# Altium PCB LoRasPi_02.PcbDoc
Units mm, origin at the board's own origin, x right, y up, seen from the top; angles counter-clockwise.
Board outline 65.85 x 56.13 mm, 4 copper layers (Top Layer, Layer 1, Layer 2, Bottom Layer), stack 1.606 mm thick; 22 components, 19 nets, 154 pads, 156 vias.
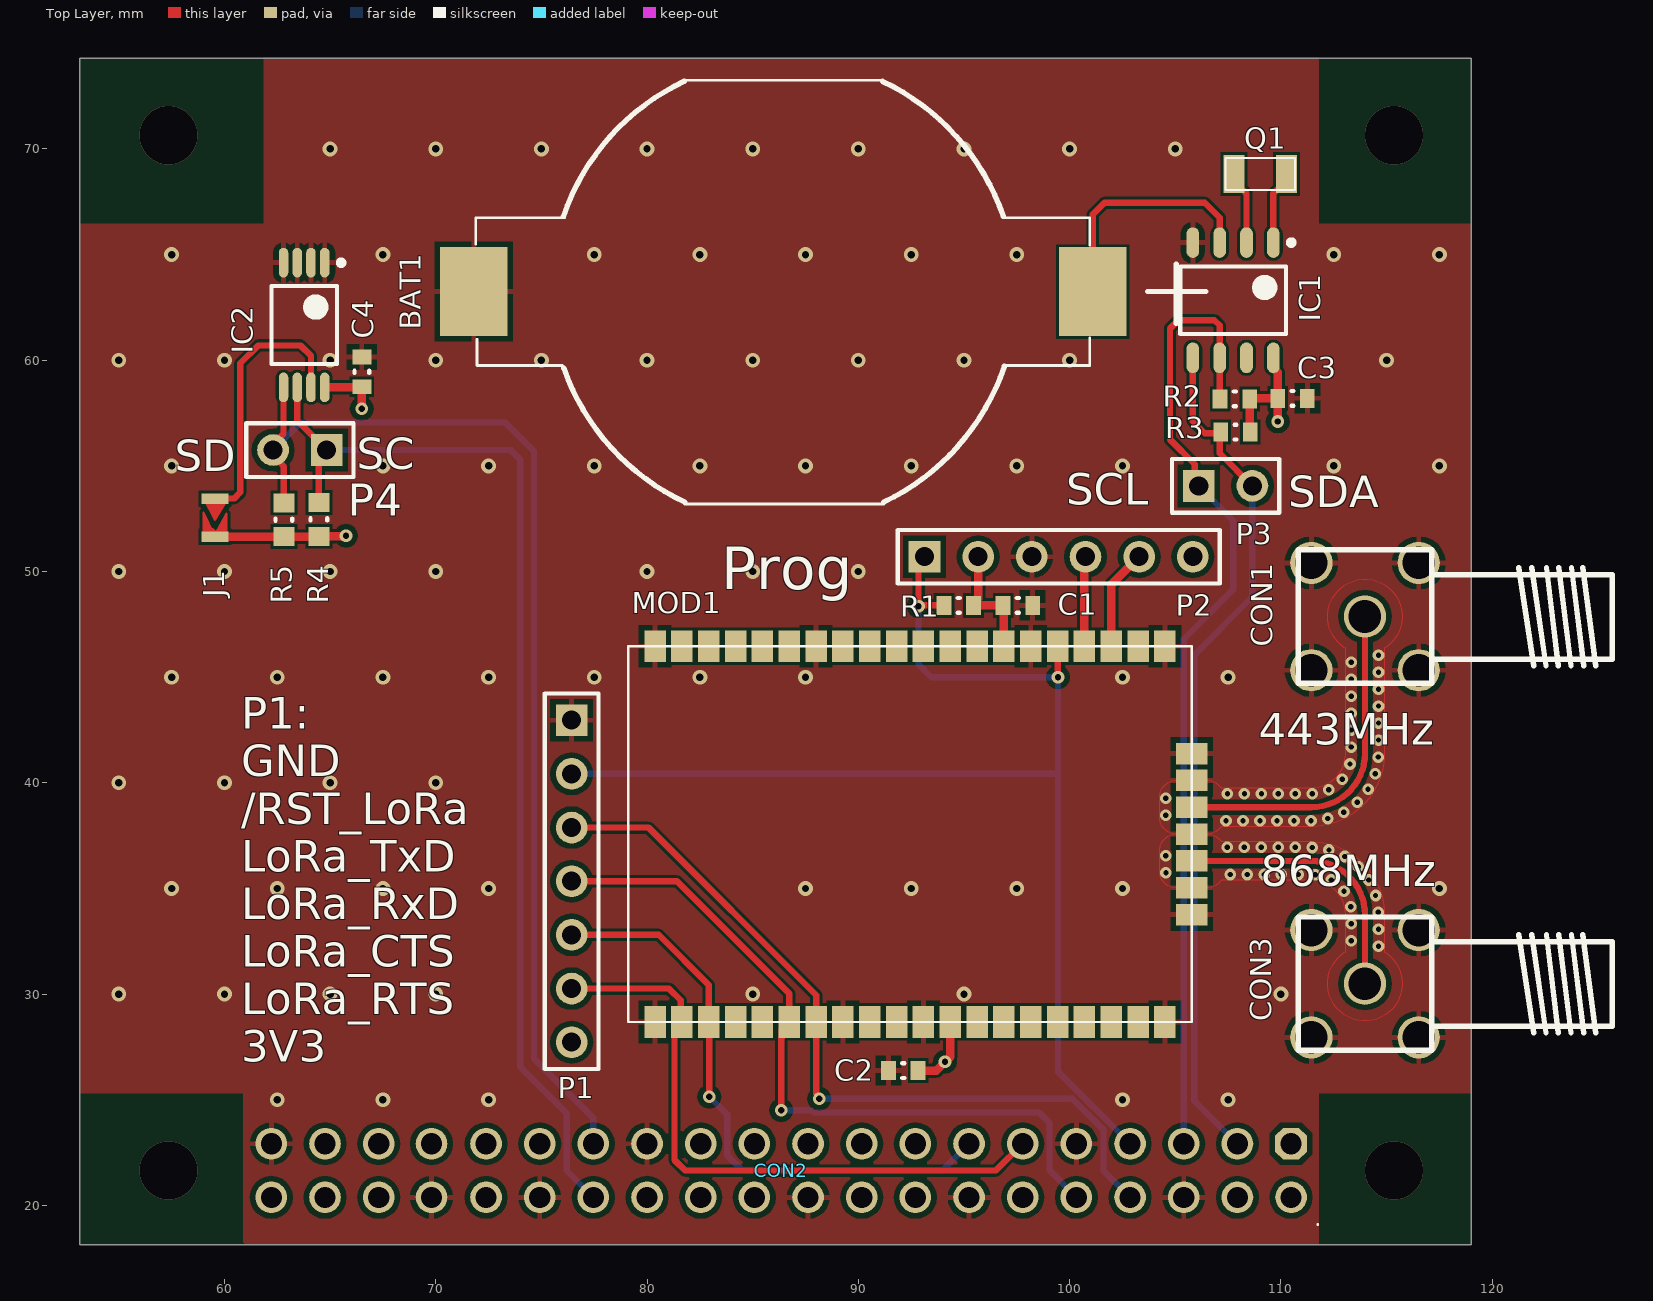
[diagram p0: Top Layer view]
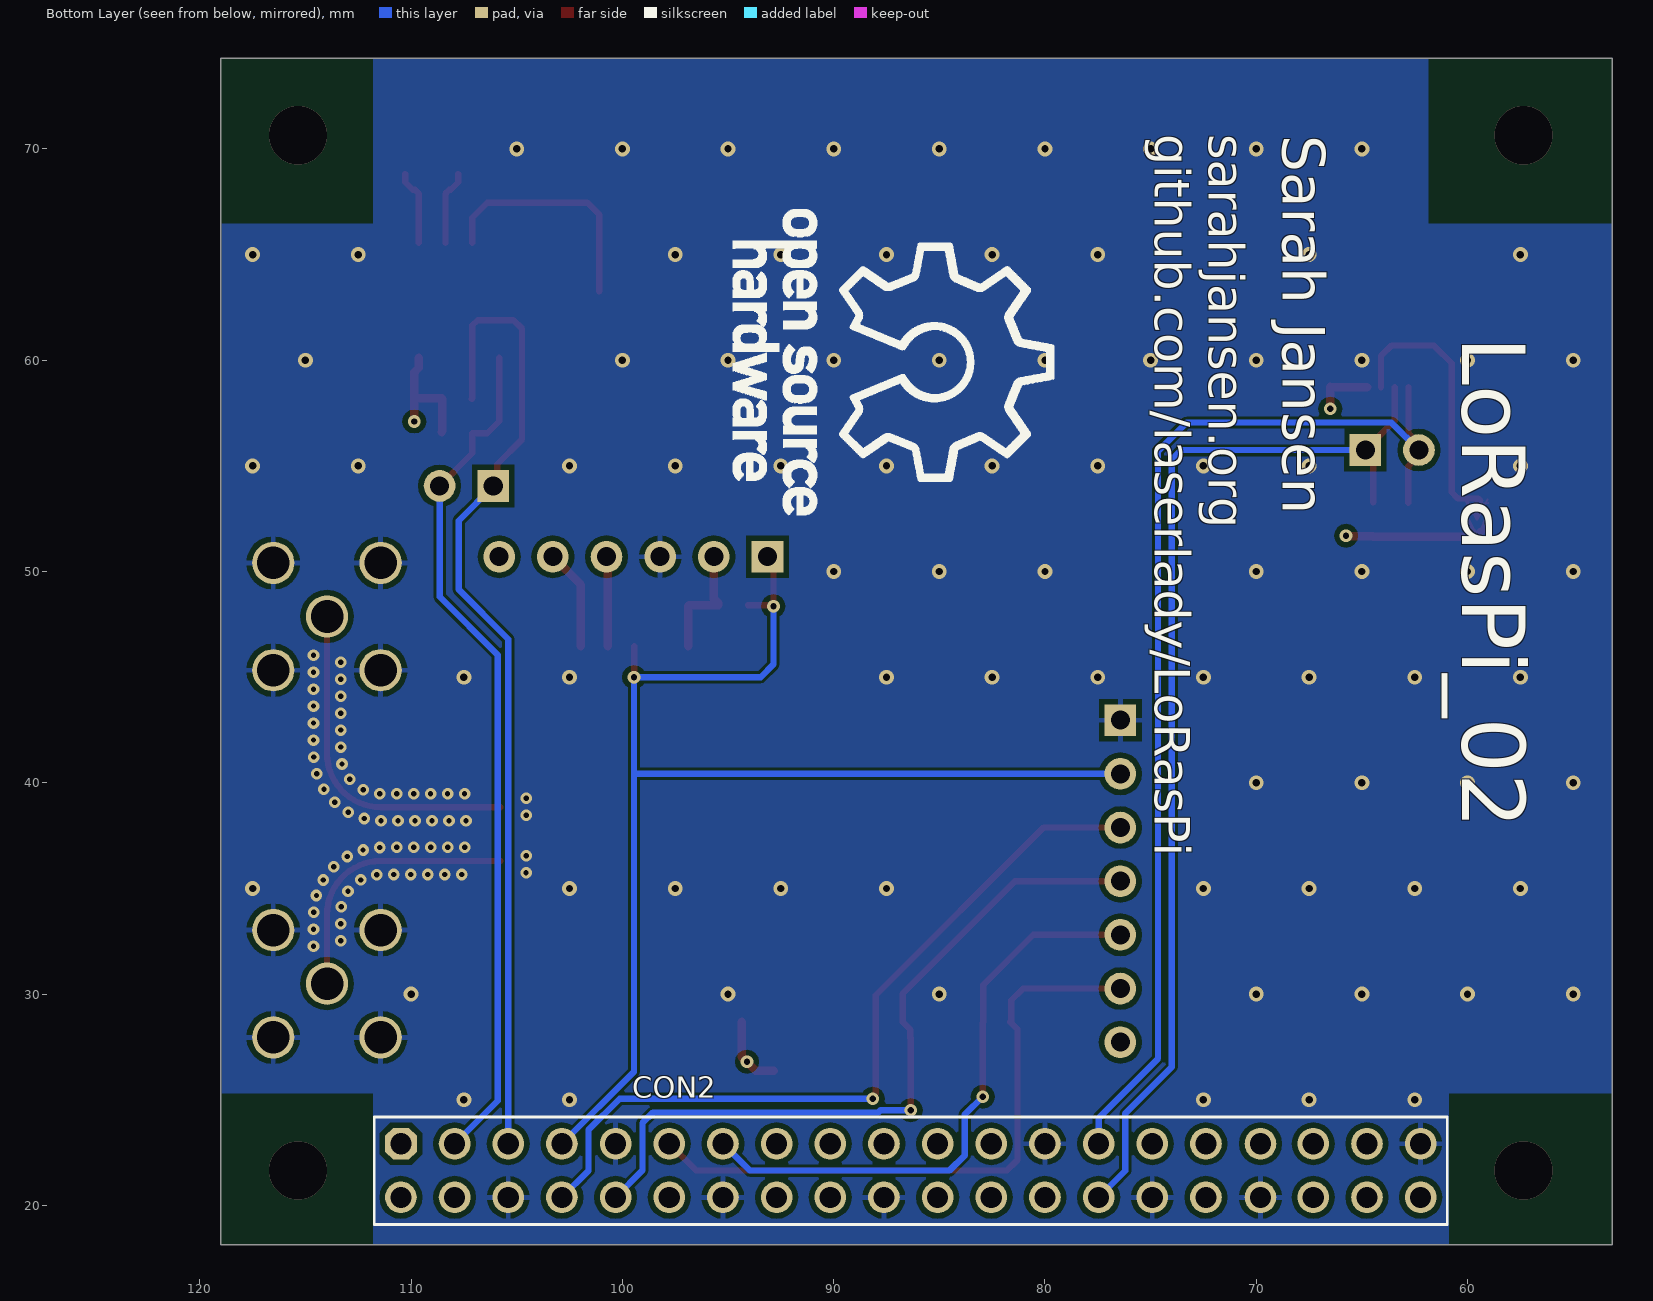
[diagram p1: Bottom Layer view, seen from below]
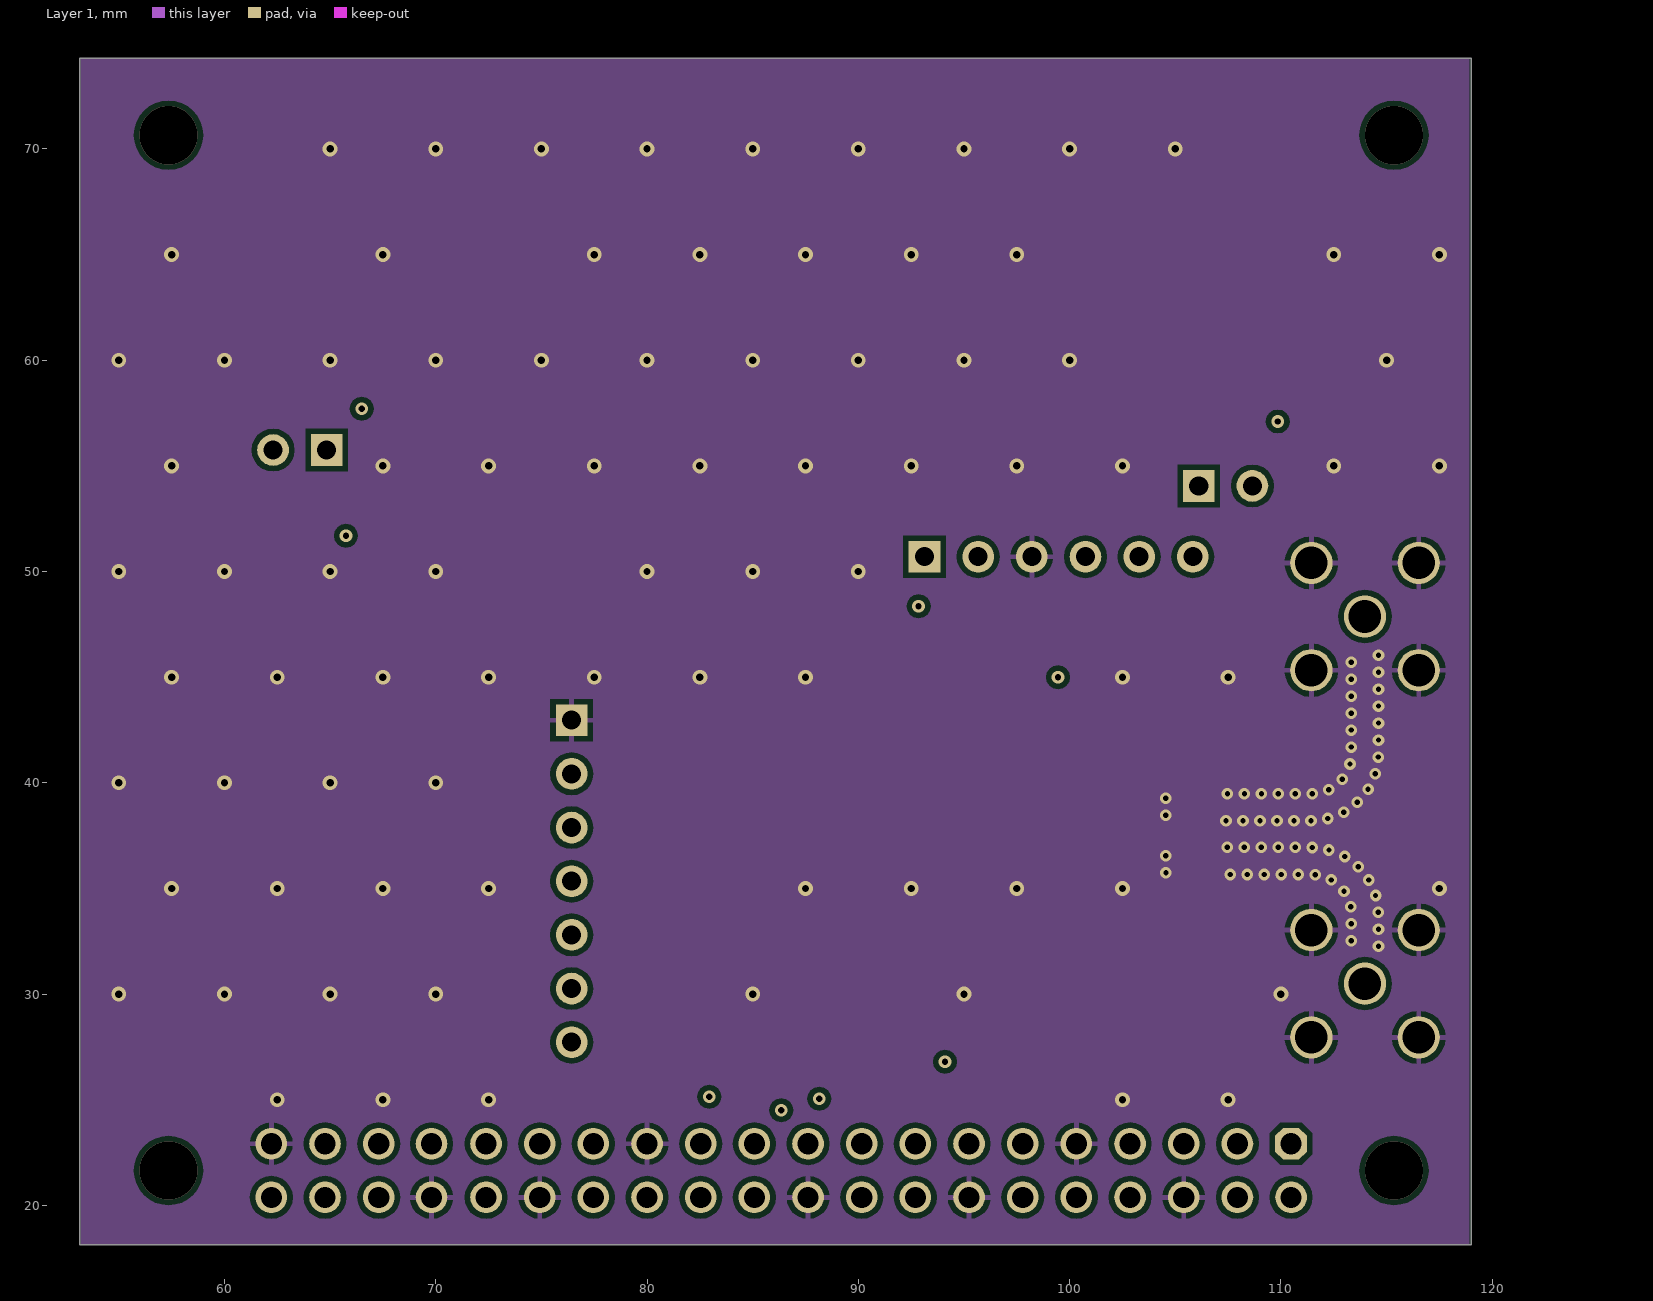
[diagram p2: Layer 1]
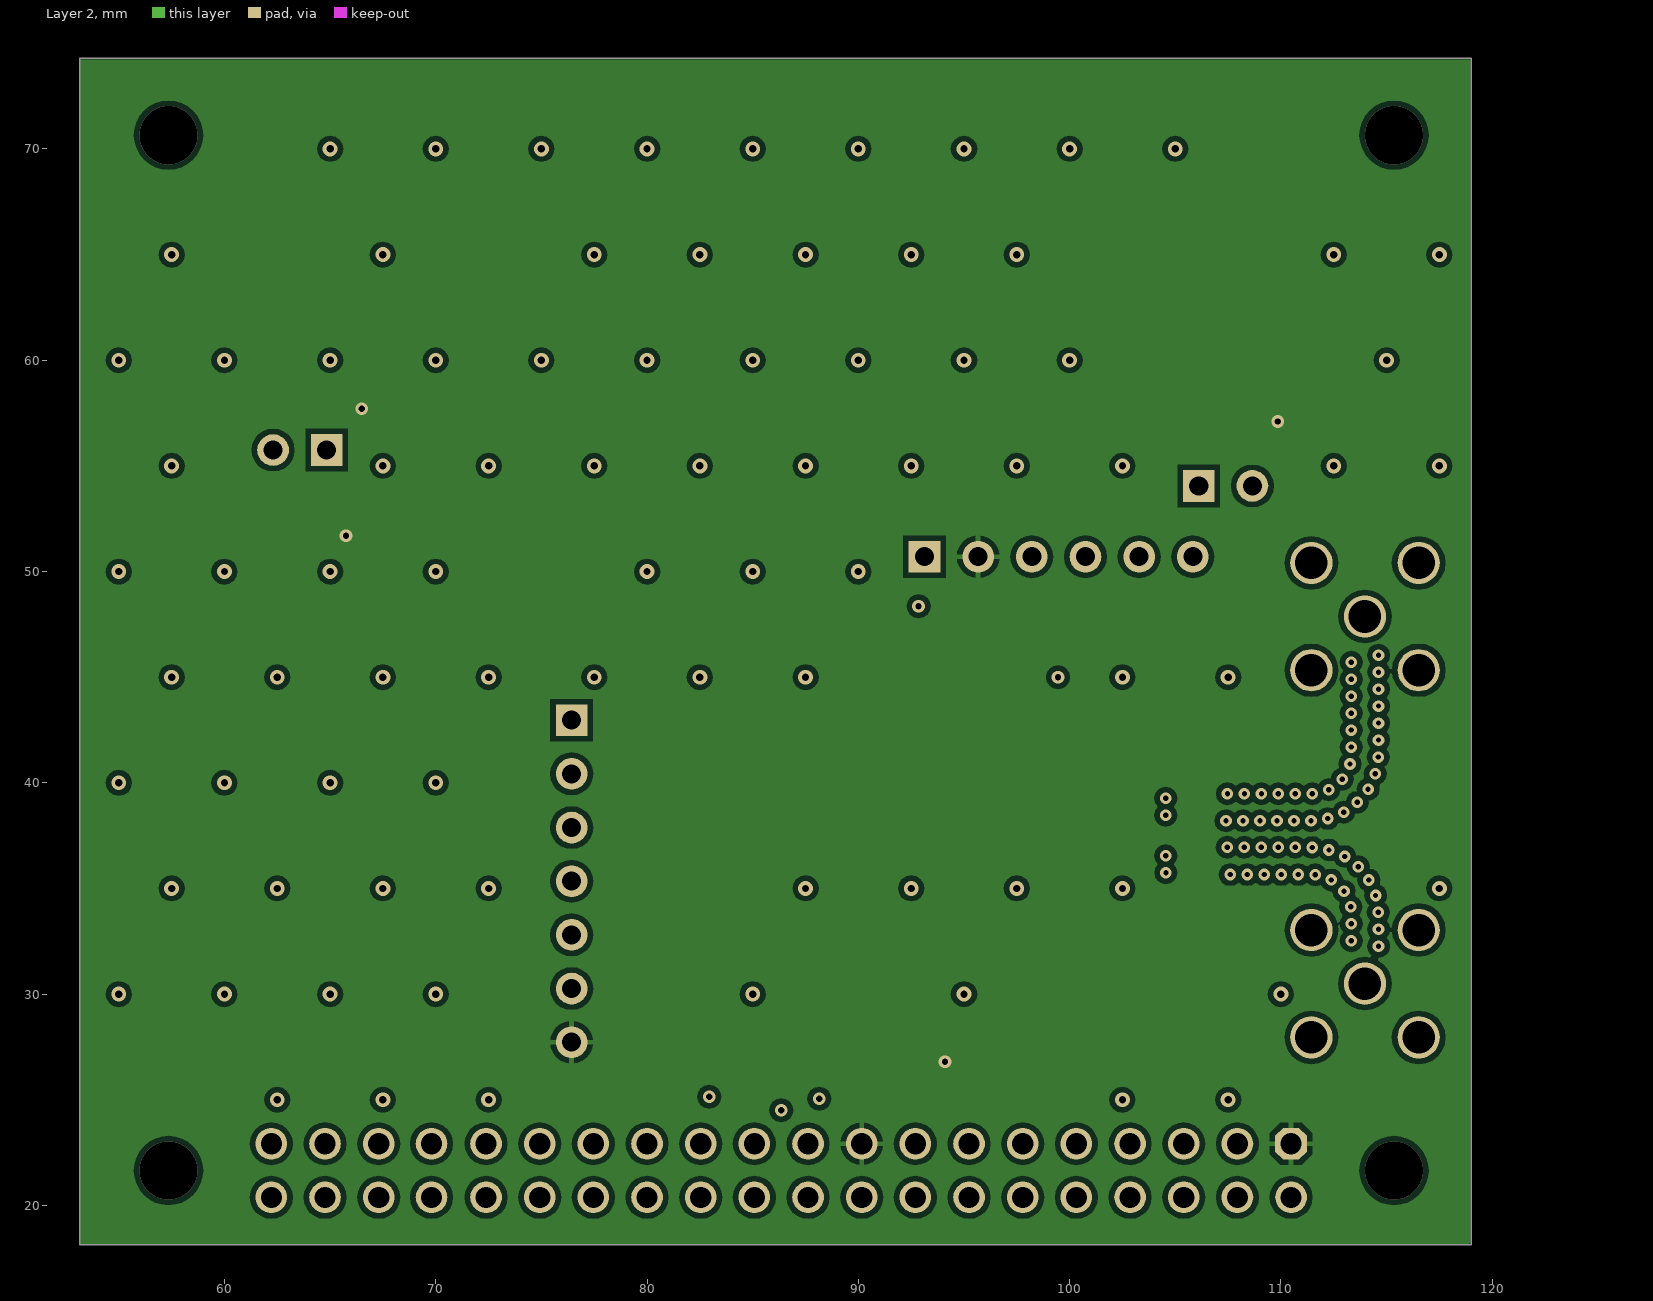
[diagram p3: Layer 2]
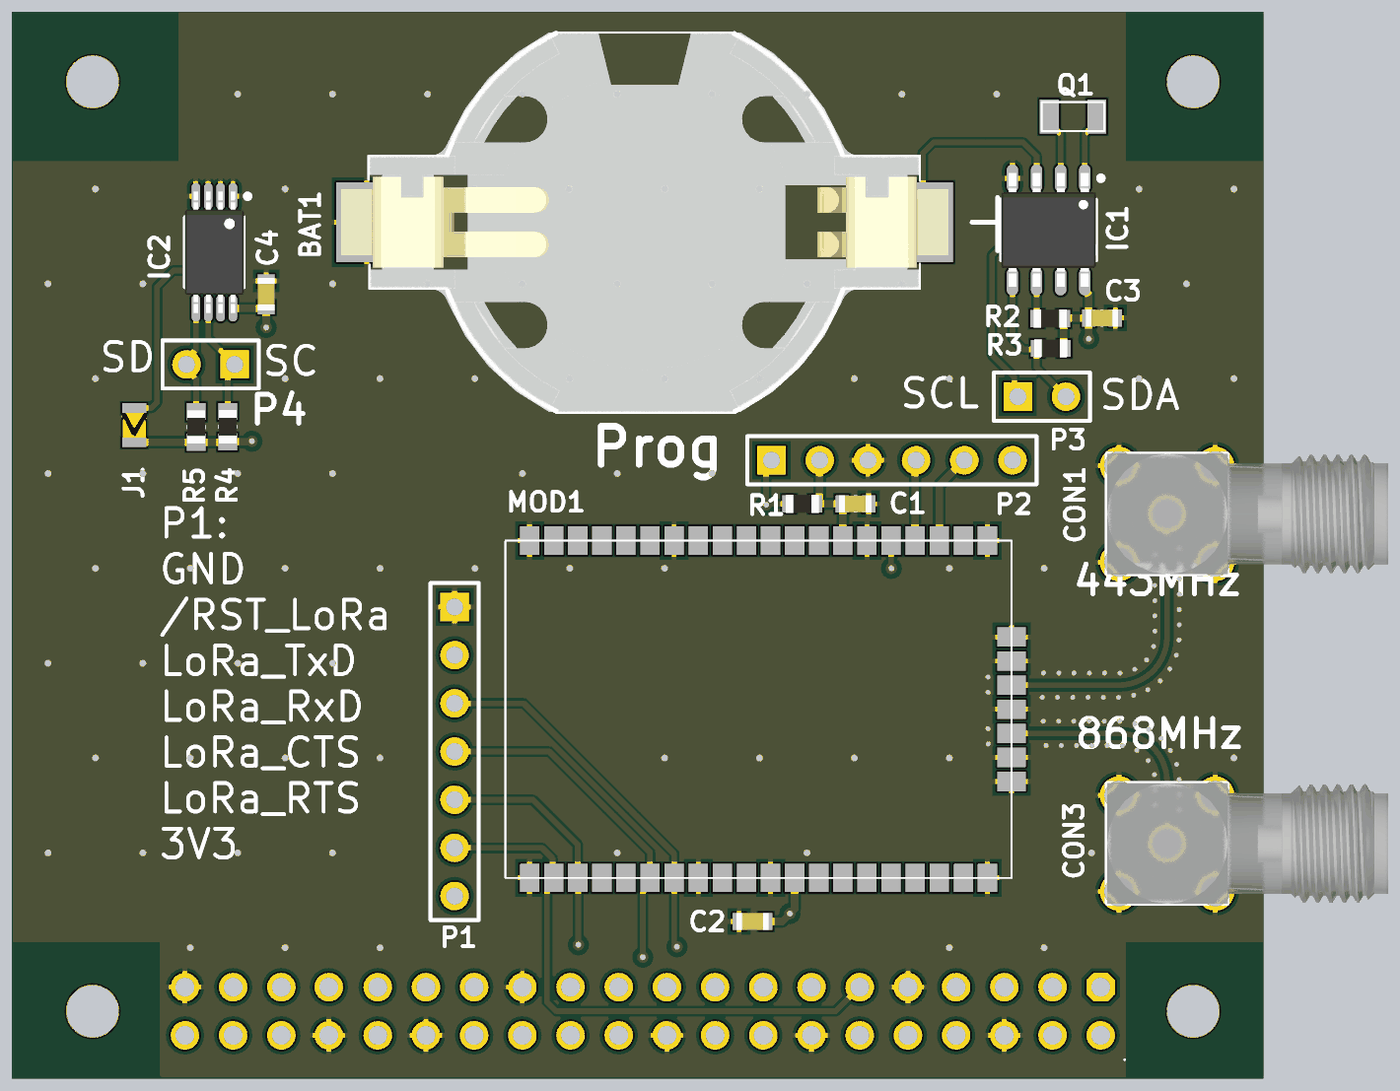
[diagram p4: 3D render of the assembled board from above, using the file's embedded part models]

## Layer stack, top to bottom
Top Solder: solder mask 0.0102, Solder Resist, Dk 3.5
Top Layer: signal copper 0.0356
Dielectric 2: prepreg 0.2, PP-006, Dk 4.1
Layer 1: signal copper 0.035
Dielectric 1: dielectric 1.065, FR-4, Dk 4.8
Layer 2: signal copper 0.035
Dielectric 3: prepreg 0.2, PP-006, Dk 4.1
Bottom Layer: signal copper 0.0356
Bottom Solder: solder mask 0.0102, Solder Resist, Dk 3.5

## Board outline
53.15,18.15 119.001,18.15 119.001,74.284 53.15,74.284

## Design rules (kind name [scope] priority, off if disabled: settings)
Clearance [All] p1: gap=0.254 ignorepadtopadclearanceinfootprint=FALSE except(0: THPad-Hole Via-Hole Fill-Hole Poly-Hole Region-Hole Text-Hole; 0.127: Arc-Arc Arc-Track Arc-Fill Arc-Poly Arc-Region Track-Track Track-Fill Track-Poly Track-Region SMDPad-SMDPad SMDPad-Via SMDPad-Fill SMDPad-Poly SMDPad-Region; 0.2: Arc-SMDPad Arc-Via Track-SMDPad Track-Via; 0.33: Arc-THPad Track-THPad SMDPad-THPad THPad-Via; 0.5: THPad-THPad)
HoleSize [All] p1: absolutevalues=TRUE maxlimit=6.3 minlimit=0.3 maxpercent=80.000 minpercent=20.000
MinimumAnnularRing [All] p1: minimumring=0.15
PlaneClearance PlaneClearance_1 [InNetClass('HF')] p1: clearance=0.2
PlaneClearance [All] p2: clearance=0.508
PolygonConnect [All] p1: thpad.connectstyle=Relief thpad.reliefconductorwidth=0.254 thpad.reliefentries=4 thpad.polygonreliefangle="90 Angle" thpad.airgapwidth=0.254 smdpad.connectstyle=Relief smdpad.reliefconductorwidth=0.254 smdpad.reliefentries=4 smdpad.polygonreliefangle="90 Angle" smdpad.airgapwidth=0.254 via.connectstyle=Direct via.reliefconductorwidth=0.254 via.reliefentries=4 via.polygonreliefangle="90 Angle" via.airgapwidth=0.254
RoutingVias [All] p1: holewidth=0.3 width=0.6 viastyle="Through Hole" minholewidth=0.2 minwidth=0.5 maxholewidth=1 maxwidth=2
SolderMaskExpansion [All] p1: expansion=0.102 istentingtop=FALSE
Width "Schematic Width Constraint" [InNetClass('HF')] p1: maxlimit=0.293 minlimit=0.254 preferedwidth=0.254 toplayer_minwidth=0.293 toplayer_prefwidth=0.293 midlayer1_maxwidth=0.254 midlayer2_maxwidth=0.254 bottomlayer_maxwidth=0.254 minimp=50.000000 maximp=50.000000 favimp=50.000000
Width [All] p2: maxlimit=2 minlimit=0.2 preferedwidth=0.254 minimp=50.000000 maximp=50.000000 favimp=50.000000
28 further rules are at their usual default settings.

## Classes and differential pairs
net class HF: HF-Out-433 HF-Out-868

## Components (designator, comment, footprint, x,y, rotation, side; value= is the part's Value field where it differs from the comment)
BAT1 "BU2032SM-HD-G" BU2032SM-HD-G 86.45,63.25 r0 top
C1 "1u 25v" C-0603-H 97.55,48.4 r180 top
C2 "1u 25v" C-0603-H 92.13,26.383 r0 top
C3 "100n 25V" C-0603-H 110.55,58.2 r180 top
C4 "100n 25V" C-0603-H 66.5,59.45 r270 top
CON1 "733910080" 733910080 113.98,47.869 r270 top
CON2 "RasPi Expansion" "RasPi Expansion" 86.35,21.65 r90 top
CON3 "733910080" 733910080 113.98,30.493 r270 top
IC1 "DS1307" SOIC8 107.735,62.842 r270 top
IC2 "24C64" TSSOP8 63.77,61.667 r270 top
J1 "Lötbrücke_kl" Solderbridge_kl 59.55,52.55 r180 top
MOD1 "RN2483" RN2483 79.11,46.463 r270 top
P1 "Header 7" HDR1X7 76.43,42.963 r270 top
P2 "Header 6" HDR1X6 93.13,50.7 r0 top
P3 "Header 2" HDR1X2 106.11,54.05 r0 top
P4 "Header 2" HDR1X2 64.84,55.75 r180 top
Q1 "FC-135R 32.7680KA-A3" FC-135 109.02,68.817 r0 top
R1 "10k" R-0603-H 94.75,48.4 r0 top
R2 "10k" R-0603-H 107.82,58.167 r0 top
R3 "10k" R-0603-H 107.85,56.6 r0 top
R4 "3K9" R-0603-M 64.47,52.467 r270 top
R5 "3K9" R-0603-M 62.811,52.454 r270 top

## Footprints (in the part's own frame and the unit in brackets; to place one, negate y for a bottom-side part, rotate by r counter-clockwise, add the part's x,y. Pads: shape width x height; smd on the part's side, far side on the other; paste and mask are expansions set on the pad)
733910080 [mm]
  round 2 hole 1.54: 1(-0.003,-0.004) 2(-2.54,2.54) 3(2.54,2.54) 4(2.54,-2.54) 5(-2.54,-2.54)
  silkscreen extent -3.16,-3.15 3.15,11.7, body extent -3.18,-3.15 3.17,11.65, height 10.07
BU2032SM-HD-G [mm]
  rect 3.2x4.2 smd: 1(14.65,0) 2(-14.65,0)
  silkscreen extent -14.55,-10.05 20,10, body extent -16,-10 16,10, height 5.3
C-0603-H [mm] "Chip Resistor, Body 1.6x0.8mm, IPC High Density"
  rect 0.7x0.9 smd: 1(-0.7,0) 2(0.7,0)
  silkscreen extent -0.05,-0.35 0.05,0.35, body extent -0.85,-0.45 0.85,0.45, height 0.9
FC-135 [mm]
  rect 1x1.8 smd: 1(-1.25,0) 2(1.25,0)
  silkscreen extent -1.65,-0.76 1.65,0.76, body extent -1.65,-0.76 1.65,0.76, height 0.8
HDR1X2 [mm] "Connector; Header; 2 Position"
  rect 1.5x1.5 hole 0.9: 1(0,0)
  round 1.5 hole 0.9: 2(2.54,0)
  silkscreen extent -1.27,-1.27 3.81,1.27
HDR1X6 [mm] "Connector; Header; 6 Position"
  rect 1.5x1.5 hole 0.9: 1(0,0)
  round 1.5 hole 0.9: 2(2.54,0) 3(5.08,0) 4(7.62,0) 5(10.16,0) 6(12.7,0)
  silkscreen extent -1.27,-1.27 13.97,1.27
HDR1X7 [mm] "Connector; Header; 7 Position"
  rect 1.5x1.5 hole 0.9: 1(0,0)
  round 1.5 hole 0.9: 2(2.54,0) 3(5.08,0) 4(7.62,0) 5(10.16,0) 6(12.7,0) 7(15.24,0)
  silkscreen extent -1.27,-1.27 16.51,1.27
R-0603-H [mm] "Chip Resistor, Body 1.6x0.8mm, IPC High Density"
  rect 0.7x0.9 smd: 1(-0.7,0) 2(0.7,0)
  silkscreen extent -0.05,-0.35 0.05,0.35, body extent -0.87,-0.47 0.88,0.48, height 0.55
R-0603-M [mm] "Chip Resistor, Body 1.6x0.8mm, IPC Medium Density"
  rect 0.9x1 smd: 1(-0.8,0) 2(0.8,0)
  silkscreen extent -0.05,-0.4 0.05,0.4, body extent -0.87,-0.47 0.88,0.48, height 0.55
"RasPi Expansion" [mm]
  oct 1.5x1.5 hole 1: 1(1.27,-24.13)
  round 1.5 hole 1: 2(-1.27,-24.13) 3(1.27,-21.59) 4(-1.27,-21.59) 5(1.27,-19.05) 6(-1.27,-19.05) 7(1.27,-16.51) 8(-1.27,-16.51) 9(1.27,-13.97) 10(-1.27,-13.97) 11(1.27,-11.43) 12(-1.27,-11.43) 13(1.27,-8.89) 14(-1.27,-8.89) 15(1.27,-6.35) 16(-1.27,-6.35) 17(1.27,-3.81) 18(-1.27,-3.81) 19(1.27,-1.27) 20(-1.27,-1.27) 21(1.27,1.27) 22(-1.27,1.27) 23(1.27,3.81) 24(-1.27,3.81) 25(1.27,6.35) 26(-1.27,6.35) 27(1.27,8.89) 28(-1.27,8.89) 29(1.27,11.43) 30(-1.27,11.43) 31(1.27,13.97) 32(-1.27,13.97) 33(1.27,16.55) 34(-1.27,16.55) 35(1.27,19.05) 36(-1.27,19.05) 37(1.27,21.59) 38(-1.27,21.59) 39(1.27,24.13) 40(-1.27,24.13)
  silkscreen extent -2.56,-25.39 -2.55,-25.39
RN2483 [mm]
  rect 1.5x1.02 smd: 1(17.78,1.27) 2(17.78,2.54) 3(17.78,3.81) 4(17.78,5.08) 5(17.78,6.35) 6(17.78,7.62) 7(17.78,8.89) 8(17.78,10.16) 9(17.78,11.43) 10(17.78,12.7) 11(17.78,13.97) 12(17.78,15.24) 13(17.78,16.51) 14(17.78,17.78) 15(17.78,19.05) 16(17.78,20.32) 17(17.78,21.59) 18(17.78,22.86) 19(17.78,24.13) 20(17.78,25.4) 28(0,25.4) 29(0,24.13) 30(0,22.86) 31(0,21.59) 32(0,20.32) 33(0,19.05) 34(0,17.78) 35(0,16.51) 36(0,15.24) 37(0,13.97) 38(0,12.7) 39(0,11.43) 40(0,10.16) 41(0,8.89) 42(0,7.62) 43(0,6.35) 44(0,5.08) 45(0,3.81) 46(0,2.54) 47(0,1.27)
  rect 1.02x1.5 smd: 21(12.7,26.67) 22(11.43,26.67) 23(10.16,26.67) 24(8.89,26.67) 25(7.62,26.67) 26(6.35,26.67) 27(5.08,26.67)
  silkscreen extent 0,0 17.78,26.67, body extent 0,0 17.78,26.67, height 3.34
SOIC8 [mm] "SOIC, 8-Leads, Body 4,90x3,90mm, Pitch 1,27mm, IPC Medium Density"
  oval 1.45x0.6 smd: 1(-2.725,1.905) 2(-2.725,0.635) 3(-2.725,-0.635) 4(-2.725,-1.905) 5(2.725,-1.905) 6(2.725,-0.635) 7(2.725,0.635) 8(2.725,1.905)
  silkscreen extent -2.85,-2.5 1.6,2.88, body extent -3,-2.5 3,2.5, height 1.75
Solderbridge_kl [mm]
  rect 1.27x0.5 smd mask+0.102: 1(0,0.9)
  rect 1.27x0.5 smd: 2(0,-0.9)
  Top Layer lines w0.1: 0.55,-0.244 0.55,0.7 0.15,0.7 0.5,-0.15 ; 0.55,-0.25 0.05,0.8 ; 0.55,-0.7 -0.45,-0.65 ; 0.5,-0.05 0.5,0.65 0.25,0.65 0.45,0.1 0.45,0.6 0.35,0.6 0.35,0.375 0.45,0.55 ; 0.5,-0.85 0.002,0.1 ; 0.05,-0.5 0,-0.35 -0.05,-0.5 0.15,-0.5 0,-0.2 -0.15,-0.55 0.25,-0.55 0,-0.05 -0.25,-0.6 0.35,-0.6 ; 0.002,0.095 -0.548,-0.805 ; 0,0.8 -0.55,-0.2 ; -0.35,-0.6 0.35,-0.6 ; -0.4,0.4 -0.45,0.1 -0.45,0.4 -0.3,0.55 -0.45,0.55 -0.45,0.2 -0.2,0.6 -0.5,0.6 -0.5,-0.05 -0.1,0.65 -0.55,0.65 -0.55,-0.194 ; 0.35,-0.6 0,0.1 -0.3,-0.55 -0.3,-0.6 ; -0.3,-0.6 -0.43,-0.73 -0.3,-0.6
TSSOP8 [mm] "TSOP, 8-Leads, Body 3,00x4,40mm, Pitch 0,65mm, IPC Medium Density"
  oval 1.4x0.45 smd: 1(-2.95,0.975) 2(-2.95,0.325) 3(-2.95,-0.325) 4(-2.95,-0.975) 5(2.95,-0.975) 6(2.95,-0.325) 7(2.95,0.325) 8(2.95,0.975)
  silkscreen extent -3.07,-1.55 1.85,1.88, body extent -3.2,-1.55 3.2,1.55, height 1.2

## Part data
BAT1: "Batteriehalter CR2032"
C1 C2: library part C-0603-1u-25V, "Capacitor 1uF 25V", Supplier Part Number 1=80-C0603C105K3R, Supplier 1=Mouser
C3 C4: library part C-0603-100n-25V, "Capacitor 100n 25V", Supplier Part Number 1=80-C0603C104K3R, Supplier 1=Mouser
CON1 CON3: "SMA Connector THT gewinkelt", Supplier Part Number 1=WM4088-ND, ComponentLink1Description="New link", Supplier 1=Digi-Key, Supplier 2=Farnell, Supplier 3=Mouser, Supplier 4=Arrow, Supplier Part Number 2=2579835, Supplier Part Number 3=538-73391-0080, Supplier Part Number 4=73391-0080
CON2: library part "RasPi Expansion_2", "Raspberry Pi, 40P Expansion port"
IC1: "RTC, I2C, 64x8"
IC2: library part "M24C64 DW", "EEPROM 64KBit I2C TSSOP8"
J1: library part Solderbridge_kl, "Lötbrücke klein"
MOD1: "LoRa Modul", Supplier Part Number 1=RN2483A-I/RM105-ND, Supplier 1=Digi-Key, Supplier 2=Farnell, Supplier 3=Mouser, Supplier Part Number 2=2932051, Supplier Part Number 3=579-RN2483A-I/RM105
P1: "Header, 7-Pin", LatestRevisionDate=17-Jul-2002, LatestRevisionNote="Re-released for DXP Platform.", Publisher="Altium Limited"
P2: "Header, 6-Pin", LatestRevisionDate=17-Jul-2002, LatestRevisionNote="Re-released for DXP Platform.", Publisher="Altium Limited"
P3 P4: "Header, 2-Pin", LatestRevisionDate=17-Jul-2002, LatestRevisionNote="Re-released for DXP Platform.", Publisher="Altium Limited"
Q1: library part "Xtal FC-135 32.7680KA-A3", "32,768KHz", Supplier Part Number 1=SE2413CT-ND, Supplier 1=Digi-Key, Supplier 2=Mouser, Supplier Part Number 2=732-FC-13532.768KAAC
R1 R2 R3: library part R-0603-10k, "Resistor 10k", Supplier Part Number 1=71-CRCW0603-10K-E3, Supplier 1=Mouser
R4 R5: library part R-0603-3k9, "Resistor 3k9"

## Via types
v1: diameter 0.7, hole 0.35, Top Layer to Bottom Layer, tented both sides, 81 vias
v2: diameter 0.55, hole 0.25, Top Layer to Bottom Layer, tented both sides, 62 vias
v3: diameter 0.6, hole 0.3, Top Layer to Bottom Layer, tented both sides, 9 vias
v4: diameter 2.75, hole 2.75, Top Layer to Bottom Layer, 4 vias

## Nets (pads, with @x,y where several pads share a name; then routed paths per layer and width w, separated by ;. In a path a pad name is that pad's centre, name@x,y a point inside that pad or via, vN(x,y) a via of type N, cw(c..) or ccw(c..) an arc to the next point about the centre after c; other vN are vias at no path point)
/RST_LoRa: CON2.7 MOD1.32 P1.2 P2.1 R1.1 | length 61.3
  Top Layer w0.3: P2.1 92.85,50.42 v3(92.85,48.35) 92.9,48.4 R1.1 ; MOD1.32 99.43,45.07 99.45,45.05 v3(99.45,45)
  Bottom Layer w0.3: P1.2 99.423,40.423 99.45,40.45 ; v3(92.85,48.35) 92.85,45.6 93.45,45 v3(99.45,45) 99.45,40.45 ; CON2.7 99.45,26.33 99.45,40.45
GND: BAT1.2 C1.1 C2.1 C3.1 C4.1 CON1.2 CON1.3 CON1.4 CON1.5 CON2.6 CON2.9 CON2.14 CON2.20 CON2.25 CON2.30 CON2.34 CON2.39 CON3.2 CON3.3 CON3.4 CON3.5 IC1.4 IC2.1 IC2.2 IC2.3 IC2.4 MOD1.1 MOD1.8 MOD1.11 MOD1.20 MOD1.21 MOD1.22 MOD1.24 MOD1.26 MOD1.27 MOD1.28 MOD1.33 MOD1.41 MOD1.47 P1.1 P2.3
  other v1: 62.5,25 67.5,25 72.5,25 102.5,25 107.5,25 55,30 60,30 65,30 70,30 85,30 95,30 110,30 57.5,35 62.5,35 67.5,35 72.5,35 87.5,35 92.5,35 97.5,35 102.5,35 117.5,35 55,40 60,40 65,40 70,40 57.5,45 62.5,45 67.5,45 72.5,45 77.5,45 82.5,45 87.5,45 102.5,45 107.5,45 55,50 60,50 65,50 70,50 80,50 85,50 90,50 57.5,55 67.5,55 72.5,55 77.5,55 82.5,55 87.5,55 92.5,55 97.5,55 102.5,55 112.5,55 117.5,55 55,60 60,60 65,60 70,60 75,60 80,60 85,60 90,60 95,60 100,60 115,60 57.5,65 67.5,65 77.5,65 82.5,65 87.5,65 92.5,65 97.5,65 112.5,65 117.5,65 65,70 70,70 75,70 80,70 85,70 90,70 95,70 100,70 105,70
  other v2: 114.619,32.265 113.333,32.523 114.619,33.069 113.333,33.327 114.608,33.873 113.305,34.13 114.48,34.666 112.983,34.867 112.386,35.405 114.152,35.4 107.6,35.66 108.404,35.66 109.208,35.66 110.012,35.66 110.816,35.66 111.62,35.65 104.556,35.743 113.658,36.035 113.013,36.515 104.546,36.547 112.271,36.824 111.475,36.941 107.455,36.946 108.259,36.946 109.063,36.946 109.867,36.946 110.671,36.946 107.401,38.2 108.205,38.2 109.009,38.2 109.813,38.2 110.617,38.2 111.421,38.2 112.218,38.31 104.546,38.468 112.967,38.602 113.616,39.075 104.546,39.272 111.487,39.483 107.467,39.486 108.271,39.486 109.075,39.486 109.879,39.486 110.683,39.486 112.267,39.677 114.123,39.699 112.898,40.176 114.465,40.427 113.268,40.89 114.604,41.219 113.333,41.691 114.619,42.023 113.333,42.495 114.619,42.827 113.333,43.299 114.619,43.631 113.333,44.103 114.619,44.435 113.333,44.907 114.619,45.239 113.333,45.711 114.619,46.043
HF-Out-433: CON1.1 MOD1.25 | length 16.1
  Top Layer w0.293: MOD1.25 111.436,38.843 ccw(c111.436,41.383) 113.976,41.383 CON1.1
HF-Out-868: CON3.1 MOD1.23 | length 12.9
  Top Layer w0.293: MOD1.23 111.436,36.303 cw(c111.436,33.763) 113.976,33.763 CON3.1
ID-SC: CON2.28 IC2.6 P4.1 R4.1 | length 51.9
  Top Layer w0.3: IC2.6 63.445,57.145 P4.1 64.47,55.38 R4.1 R4.1@64.45,53.287
  Bottom Layer w0.3: P4.1 73.55,55.75 74,55.3 74,26.55 76.2,24.35 76.2,21.64 CON2.28
ID-SD: CON2.27 IC2.5 P4.2 R5.1 | length 53.3
  Top Layer w0.3: IC2.5 62.795,56.526 62.3,56.031 P4.2 62.3,55.485 62.811,54.974 R5.1
  Bottom Layer w0.3: P4.2 63.6,57.05 73.3,57.05 74.65,55.7 74.65,26.95 77.46,24.14 CON2.27
LoRa_CTS: CON2.13 MOD1.3 P1.5 | length 28.2
  Top Layer w0.3: P1.5 80.547,32.803 82.92,30.43 MOD1.3 82.95,28.653 v3(82.95,25.15)
  Bottom Layer w0.3: v3(82.95,25.15) 83.8,24.3 83.8,22.365 84.515,21.65 93.97,21.65 CON2.13
LoRa_RTS: CON2.11 MOD1.2 P1.6 | length 30.3
  Top Layer w0.3: P1.6 81.037,30.263 81.593,29.707 81.593,28.74 MOD1.2 81.3,28.333 81.3,22.15 81.8,21.65 96.51,21.65 CON2.11
LoRa_RxD: CON2.10 MOD1.6 P1.4 | length 35.2
  Top Layer w0.3: P1.4 81.417,35.343 86.73,30.03 MOD1.6 86.37,28.323 86.37,27.927 86.35,27.907 v3(86.35,24.5)
  Bottom Layer w0.3: v3(86.35,24.5) 87.781,24.5 87.881,24.4 98.55,24.4 99.05,23.9 99.05,21.65 CON2.10
LoRa_TxD: CON2.8 MOD1.7 P1.3 | length 37.6
  Top Layer w0.3: P1.3 80.067,37.883 88,29.95 MOD1.7 88,25.281 88.15,25.131 v3(88.15,25.05)
  Bottom Layer w0.3: v3(88.15,25.05) 100.126,25.05 101.6,23.576 101.6,21.64 CON2.8
NetBAT1_1: BAT1.1 IC1.3 | length 11.4
  Top Layer w0.3: BAT1.1 101.1,66.9 101.65,67.45 106.4,67.45 107.1,66.75 IC1.3
NetIC1_1: IC1.1 Q1.2 | length 3.6
  Top Layer w0.3: IC1.1 109.64,67.891 109.816,68.067 109.92,68.067 110.27,68.417 Q1.2
NetIC1_2: IC1.2 Q1.1 | length 3.5
  Top Layer w0.3: Q1.1 107.77,68.417 108.12,68.067 108.194,68.067 108.37,67.891 IC1.2
NetIC2_7: IC2.7 J1.2 | length 13.2
  Top Layer w0.3: J1.2@59.539,53.223 59.4,53.362 59.498,53.459 60.459,53.459 60.75,53.75 60.75,59.85 61.6,60.7 63.6,60.7 64.095,60.205 IC2.7
NetMOD1_30: MOD1.30 P2.5 | length 4.8
  Top Layer w0.4: MOD1.30 101.97,49.38 P2.5
NetMOD1_31: MOD1.31 P2.4 | length 4.3
  Top Layer w0.4: MOD1.31 100.7,50.65 P2.4
SCL: CON2.5 IC1.6 P3.1 R2.1 | length 46.9
  Top Layer w0.3: P3.1 105.926,54.234 105.926,55.074 104.75,56.25 104.75,61.5 105.15,61.9 106.85,61.9 107.1,61.65 IC1.6 107.1,58.187 R2.1
  Bottom Layer w0.3: CON2.5 105.4,46.8 107.75,49.15 107.75,52.41 P3.1
SDA: CON2.3 IC1.5 P3.2 R3.1 | length 40.8
  Top Layer w0.3: IC1.5 105.83,57.12 106.4,56.55 107.1,56.55 107.1,55.6 P3.2
  Bottom Layer w0.3: CON2.3 105.9,24.96 105.9,46.05 108.65,48.8 P3.2
VCC: C1.2 C2.2 C3.2 C4.2 CON2.1 CON2.17 IC1.8 IC2.8 J1.1 MOD1.12 MOD1.34 P1.7 P2.2 R1.2 R2.2 R3.2 R4.2 R5.2 | length 24.5
  Top Layer w0.4: J1.1@59.4,51.85 59.575,51.675 59.596,51.654 R5.2 64.457,51.654 R4.2 65.717,51.667 v3(65.75,51.7) ; J1.1 J1.1@59.6,51.7 ; IC2.8 66.467,58.717 C4.2 v3(66.5,57.7) ; C2.2 93.699,26.383 94.35,27.034 MOD1.12 ; P2.2 95.67,48.72 95.45,48.5 R1.2 C1.2 96.89,48.36 MOD1.34 ; R3.2 108.52,56.63 R2.2 108.553,58.2 C3.2 ; IC1.8 109.64,59.638 109.85,59.428 C3.2 ; v3(109.85,57.1) C3.2
  other v3: 94.1,26.8
pads on no net: CON2.2 CON2.4 CON2.12 CON2.15 CON2.16 CON2.18 CON2.19 CON2.21 CON2.22 CON2.23 CON2.24 CON2.26 CON2.29 CON2.31 CON2.32 CON2.33 CON2.35 CON2.36 CON2.37 CON2.38 CON2.40 IC1.7 MOD1.4 MOD1.5 MOD1.9 MOD1.10 MOD1.13 MOD1.14 MOD1.15 MOD1.16 MOD1.17 MOD1.18 MOD1.19 MOD1.29 MOD1.35 MOD1.36 MOD1.37 MOD1.38 MOD1.39 MOD1.40 MOD1.42 MOD1.43 MOD1.44 MOD1.45 MOD1.46 P2.6
copper on no net:
  other v4: 57.35,21.65 115.35,21.65 57.35,70.65 115.35,70.65

## Polygon pours and split planes (outlines as drawn)
GND on Layer 1 "NONET_L-01_P-001" (solid, pour order 0): 53.2,74.284 118.92,74.284 118.92,18.117 118.87,18.067 118.77,18.167 53.2,18.167
VCC on Layer 2 "NONET_L-01_P-001" (solid, pour order 1): 118.97,74.217 118.97,18.267 118.87,18.167 53.15,18.167 53.15,74.217
GND on Top Layer "Top Layer-GND" (solid, pour order 6): 106.727,37.549 106.911,37.473 107.069,37.352 107.167,37.223 111.436,37.223 111.485,37.217 111.488,37.217 111.496,37.217 111.501,37.217 111.535,37.217 111.55,37.213 111.917,37.184 111.976,37.172 112.035,37.165 112.447,37.067 112.502,37.045 112.56,37.03 112.951,36.868 113.003,36.838 113.057,36.814 113.418,36.593 113.464,36.555 113.515,36.522 113.836,36.248 113.876,36.203 113.921,36.163 114.195,35.842 114.228,35.792 114.266,35.745 114.487,35.384 114.511,35.33 114.541,35.278 114.703,34.887 114.718,34.829 114.74,34.774 114.838,34.362 114.845,34.303 114.857,34.244 114.886,33.877 114.89,33.862 114.89,33.828 114.89,33.823 114.89,33.815 114.89,33.812 114.896,33.763 114.896,32.001 114.944,31.974 115.153,31.813 115.293,31.673 115.454,31.464 115.553,31.292 115.654,31.048 115.705,30.856 115.74,30.595 115.74,30.396 115.705,30.135 115.654,29.943 115.553,29.7 115.496,29.601 115.454,29.528 115.293,29.319 115.153,29.178 114.944,29.018 114.772,28.919 114.528,28.818 114.336,28.767 114.075,28.732 113.877,28.732 113.615,28.767 113.423,28.818 113.18,28.919 113.081,28.976 113.008,29.018 112.799,29.178 112.659,29.319 112.498,29.528 112.399,29.7 112.298,29.943 112.247,30.135 112.212,30.396 112.212,30.595 112.247,30.856 112.298,31.048 112.399,31.292 112.456,31.391 112.498,31.464 112.659,31.673 112.799,31.813 113.008,31.974 113.056,32.001 113.056,33.763 113.06,33.794 113.032,34.08 112.939,34.386 112.789,34.667 112.586,34.913 112.34,35.116 112.059,35.266 111.753,35.359 111.467,35.387 111.436,35.383 107.167,35.383 107.069,35.254 106.911,35.133 106.727,35.057 106.53,35.031 105.03,35.031 104.833,35.057 104.649,35.133 104.491,35.254 104.37,35.412 104.294,35.596 104.268,35.793 104.268,36.813 104.294,37.01 104.37,37.194 104.491,37.352 104.649,37.473 104.833,37.549 105.03,37.575 106.53,37.575
GND on Top Layer "Top Layer-GND 1" (solid, pour order 5): 114.336,49.601 114.528,49.55 114.772,49.449 114.871,49.392 114.944,49.35 115.153,49.189 115.293,49.049 115.454,48.84 115.553,48.668 115.654,48.424 115.705,48.232 115.74,47.971 115.74,47.772 115.705,47.511 115.654,47.319 115.553,47.076 115.496,46.977 115.454,46.904 115.293,46.695 115.153,46.554 114.944,46.394 114.896,46.367 114.896,41.383 114.89,41.334 114.89,41.331 114.89,41.323 114.89,41.318 114.89,41.284 114.886,41.269 114.857,40.902 114.845,40.843 114.838,40.784 114.74,40.372 114.718,40.317 114.703,40.259 114.541,39.868 114.511,39.816 114.487,39.762 114.266,39.401 114.228,39.354 114.195,39.304 113.921,38.983 113.876,38.943 113.836,38.898 113.515,38.624 113.464,38.591 113.418,38.553 113.057,38.332 113.003,38.308 112.951,38.278 112.56,38.116 112.502,38.101 112.447,38.079 112.035,37.981 111.976,37.974 111.917,37.962 111.55,37.933 111.535,37.929 111.501,37.929 111.496,37.929 111.488,37.929 111.485,37.929 111.436,37.923 107.167,37.923 107.069,37.794 106.911,37.673 106.727,37.597 106.53,37.571 105.03,37.571 104.833,37.597 104.649,37.673 104.491,37.794 104.37,37.952 104.294,38.136 104.268,38.333 104.268,39.353 104.294,39.55 104.37,39.734 104.491,39.892 104.649,40.013 104.833,40.089 105.03,40.115 106.53,40.115 106.727,40.089 106.911,40.013 107.069,39.892 107.167,39.763 111.436,39.763 111.467,39.759 111.753,39.787 112.059,39.88 112.34,40.03 112.586,40.233 112.789,40.479 112.939,40.76 113.032,41.066 113.06,41.352 113.056,41.383 113.056,46.367 113.008,46.394 112.799,46.554 112.659,46.695 112.498,46.904 112.399,47.076 112.298,47.319 112.247,47.511 112.212,47.772 112.212,47.971 112.247,48.232 112.298,48.424 112.399,48.668 112.456,48.767 112.498,48.84 112.659,49.049 112.799,49.189 113.008,49.35 113.18,49.449 113.423,49.55 113.615,49.601 113.877,49.636 114.075,49.636
GND on Top Layer "NONET_L-01_P-001" (solid, pour order 3): 61.87,74.317 111.8,74.317 111.8,66.467 119.02,66.467 119.02,25.3 111.8,25.3 111.8,18.17 60.9,18.167 60.9,25.3 53.15,25.3 53.15,18.15 53.15,74.284 53.15,66.467 61.87,66.467
GND on Bottom Layer "NONET_L-01_P-001" (solid, pour order 4): 111.8,74.267 111.8,66.467 118.97,66.467 118.97,25.317 111.8,25.317 111.8,18.167 60.9,18.167 60.9,25.317 53.15,25.317 53.15,18.168 53.15,74.284 53.15,66.467 61.87,66.467 61.87,74.267

## Other copper
Top Layer:
  pour cut-out: 106.606,36.997 106.671,36.954 106.714,36.889 106.729,36.813 106.729,36.661 111.436,36.661 111.462,36.655 111.873,36.623 111.888,36.619 111.904,36.618 112.315,36.519 112.329,36.513 112.345,36.51 112.735,36.348 112.749,36.339 112.763,36.334 113.124,36.113 113.135,36.102 113.149,36.094 113.471,35.82 113.48,35.807 113.493,35.798 113.767,35.476 113.775,35.462 113.786,35.451 114.007,35.09 114.012,35.076 114.021,35.063 114.183,34.672 114.186,34.656 114.192,34.642 114.291,34.231 114.292,34.215 114.296,34.2 114.328,33.789 114.333,33.763 114.333,31.645 114.556,31.553 114.578,31.539 114.601,31.527 114.81,31.367 114.827,31.347 114.847,31.33 115.007,31.121 115.019,31.098 115.033,31.076 115.134,30.833 115.139,30.807 115.147,30.783 115.182,30.522 115.18,30.496 115.182,30.47 115.147,30.209 115.139,30.184 115.134,30.159 115.033,29.915 115.019,29.894 115.007,29.871 114.847,29.662 114.827,29.645 114.81,29.625 114.601,29.465 114.578,29.453 114.556,29.439 114.313,29.338 114.288,29.333 114.263,29.325 114.002,29.29 113.976,29.292 113.95,29.29 113.689,29.325 113.664,29.333 113.639,29.338 113.396,29.439 113.374,29.453 113.351,29.465 113.142,29.625 113.125,29.645 113.105,29.662 112.945,29.871 112.933,29.894 112.919,29.915 112.818,30.159 112.813,30.184 112.805,30.209 112.77,30.47 112.772,30.496 112.77,30.522 112.805,30.783 112.813,30.807 112.818,30.833 112.919,31.076 112.933,31.098 112.945,31.121 113.105,31.33 113.125,31.347 113.142,31.367 113.351,31.527 113.374,31.539 113.396,31.553 113.618,31.645 113.618,33.763 113.625,33.796 113.586,34.191 113.461,34.602 113.259,34.981 112.986,35.313 112.654,35.586 112.275,35.789 111.864,35.913 111.469,35.952 111.436,35.945 106.729,35.945 106.729,35.793 106.714,35.717 106.671,35.652 106.606,35.609 106.53,35.594 105.03,35.594 104.954,35.609 104.889,35.652 104.846,35.717 104.831,35.793 104.831,36.813 104.846,36.889 104.889,36.954 104.954,36.997 105.03,37.012 106.53,37.012
  pour cut-out: 114.263,49.043 114.288,49.035 114.313,49.03 114.556,48.929 114.578,48.915 114.601,48.903 114.81,48.743 114.827,48.723 114.847,48.706 115.007,48.497 115.019,48.474 115.033,48.452 115.134,48.209 115.139,48.183 115.147,48.159 115.182,47.898 115.18,47.872 115.182,47.846 115.147,47.585 115.139,47.56 115.134,47.535 115.033,47.291 115.019,47.27 115.007,47.247 114.847,47.038 114.827,47.021 114.81,47.001 114.601,46.841 114.578,46.829 114.556,46.815 114.333,46.722 114.333,41.383 114.328,41.357 114.296,40.946 114.292,40.931 114.291,40.915 114.192,40.504 114.186,40.49 114.183,40.474 114.021,40.083 114.012,40.07 114.007,40.056 113.786,39.695 113.775,39.684 113.767,39.67 113.493,39.348 113.48,39.339 113.471,39.326 113.149,39.052 113.135,39.044 113.124,39.033 112.763,38.812 112.749,38.807 112.735,38.798 112.345,38.636 112.329,38.633 112.315,38.627 111.904,38.528 111.888,38.527 111.873,38.523 111.462,38.491 111.436,38.485 106.729,38.485 106.729,38.333 106.714,38.257 106.671,38.192 106.606,38.149 106.53,38.134 105.03,38.134 104.954,38.149 104.889,38.192 104.846,38.257 104.831,38.333 104.831,39.353 104.846,39.429 104.889,39.494 104.954,39.537 105.03,39.552 106.53,39.552 106.606,39.537 106.671,39.494 106.714,39.429 106.729,39.353 106.729,39.201 111.436,39.201 111.469,39.194 111.864,39.233 112.275,39.357 112.654,39.56 112.986,39.833 113.259,40.165 113.461,40.544 113.586,40.955 113.625,41.35 113.618,41.383 113.618,46.722 113.396,46.815 113.374,46.829 113.351,46.841 113.142,47.001 113.125,47.021 113.105,47.038 112.945,47.247 112.933,47.27 112.919,47.291 112.818,47.535 112.813,47.56 112.805,47.585 112.77,47.846 112.772,47.872 112.77,47.898 112.805,48.159 112.813,48.183 112.818,48.209 112.919,48.452 112.933,48.474 112.945,48.497 113.105,48.706 113.125,48.723 113.142,48.743 113.351,48.903 113.374,48.915 113.396,48.929 113.639,49.03 113.664,49.035 113.689,49.043 113.95,49.078 113.976,49.076 114.002,49.078

## Silkscreen, mask and mechanical layers (free items; w line width, h text height)
Top Overlay:
  text "SC" at 66.25,54.85 h1.5
  text "SD" at 57.65,54.75 h1.5
  text "SCL" at 99.85,53.15 h1.5
  text "SDA" at 110.35,53.05 h1.5
  text "Prog" at 83.5,49.15 h2
  text "443MHz" at 108.95,41.8 h1.5
  text "868MHz" at 109.05,35.1 h1.5
  text "P1: / GND / /RST_LoRa / LoRa_TxD / LoRa_RxD / LoRa_CTS / LoRa_RTS / 3V3" at 60.8,26.8 h1.5
Bottom Overlay:
  drawing of 18 lines, arcs and shapes, not listed
  text "sarahjansen.org / github.com/laserlady/LoRasPi" at 74.8,70.7 h1.7 r90
  text "Sarah Jansen" at 68.75,70.65 h2 r90
  text "LoRasPi_02" at 60.25,61.1 h3 r90
Board:
  the board outline again, w0.1